# Altium PCB Calculator_PCB.PcbDoc
Units mm, origin at the board's own origin, x right, y up, seen from the top; angles counter-clockwise.
Board outline 55 x 114 mm, 2 copper layers (Top Layer, Bottom Layer); 61 components, 55 nets, 256 pads, 33 vias.
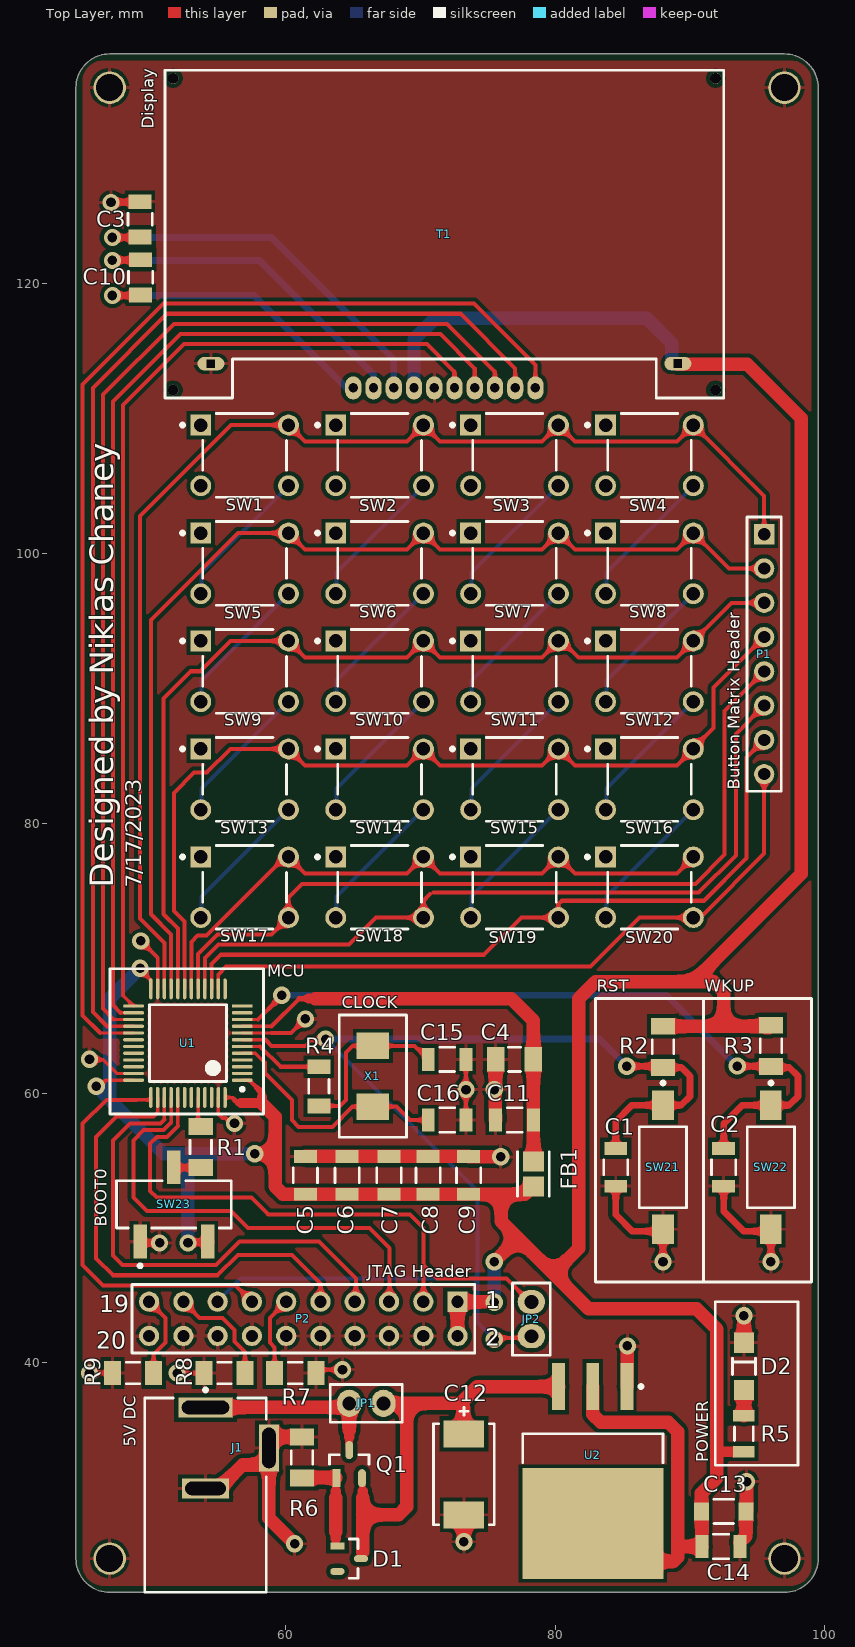
[diagram p0: Top Layer view]
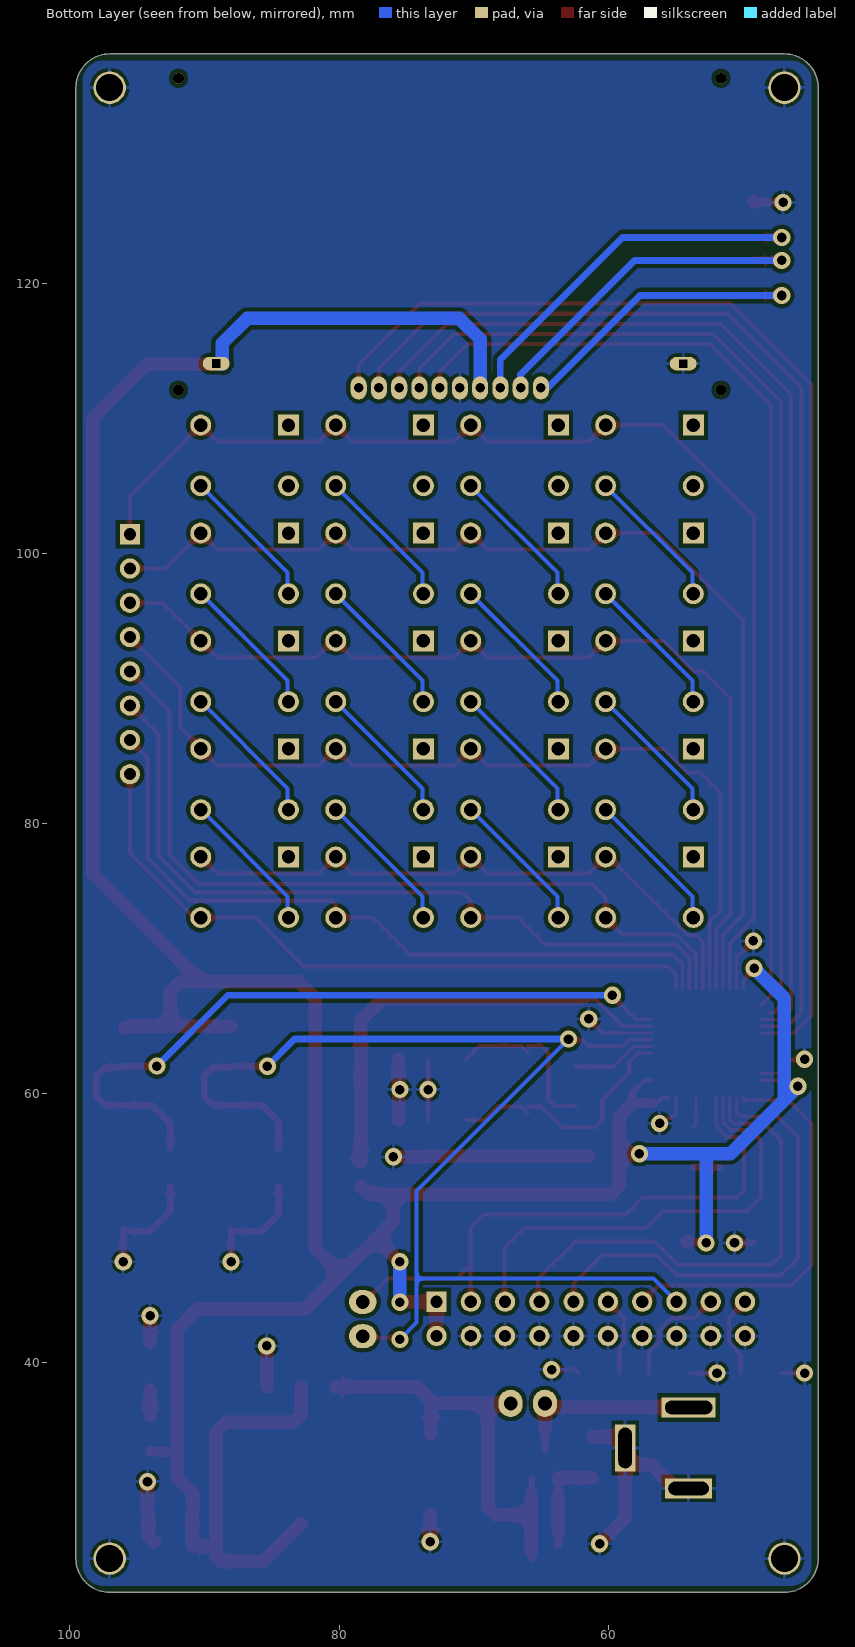
[diagram p1: Bottom Layer view, seen from below]
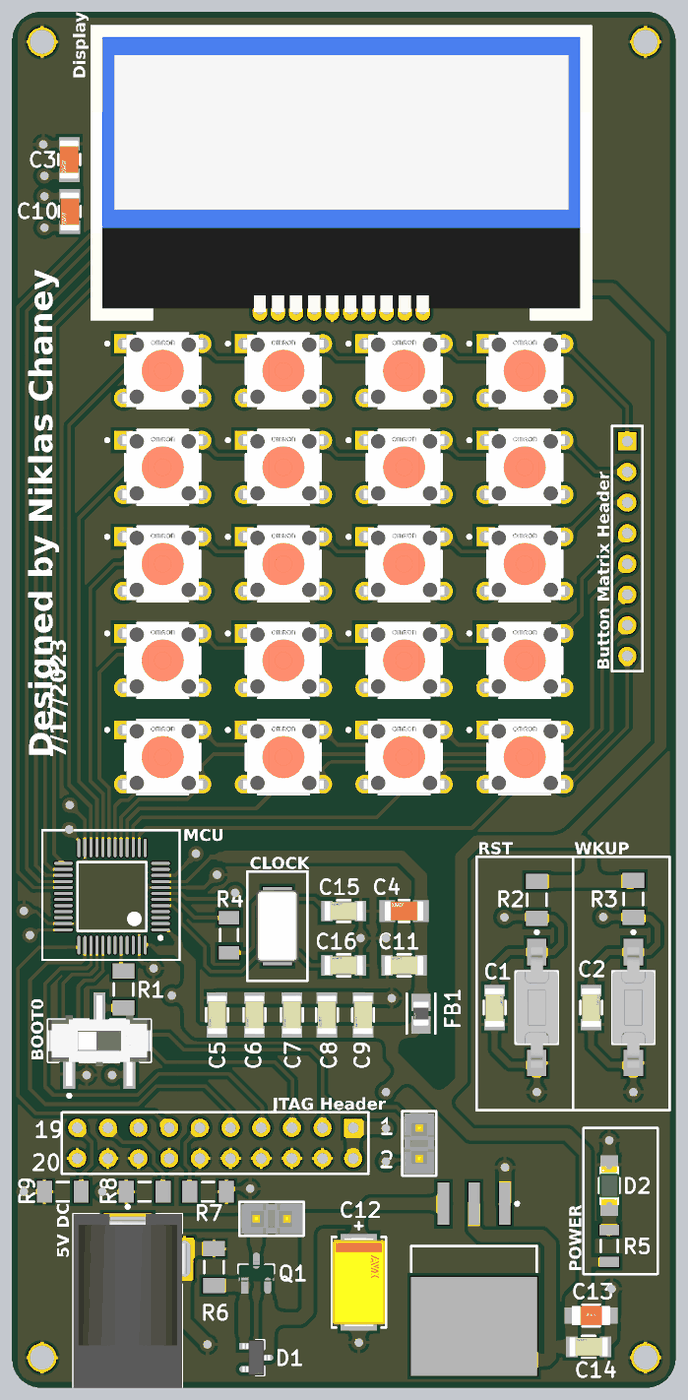
[diagram p2: 3D render of the assembled board from above, using the file's embedded part models]

## Layer stack, top to bottom
Top Solder: solder mask 0.0102, Solder Resist, Dk 3.5
Top Layer: signal copper 0.0356
Dielectric 1: dielectric 0.32, FR-4, Dk 4.8
Bottom Layer: signal copper 0.0356
Bottom Solder: solder mask 0.0102, Solder Resist, Dk 3.5

## Board outline
44.5,25.5 ccw(c47,25.5) 47,23 97,23 ccw(c97,25.5) 99.5,25.5 99.5,134.5 ccw(c97,134.5) 97,137 47,137 ccw(c47,134.5) 44.5,134.5

## Design rules (kind name [scope] priority, off if disabled: settings)
Clearance [All] p1: gap=0.127 ignorepadtopadclearanceinfootprint=TRUE
HoleSize [All] p1: absolutevalues=TRUE maxlimit=5 minlimit=0.025 maxpercent=80.000 minpercent=20.000
MinimumSolderMaskSliver [All] p1: minsoldermaskwidth=0.046
PolygonConnect [All] p1: connectstyle=Relief reliefconductorwidth=0.254 reliefentries=4 polygonreliefangle="90 Angle" airgapwidth=0.254
RoutingVias [All] p1: holewidth=0.3 width=0.6 viastyle="Through Hole" minholewidth=0.3 minwidth=0.6 maxholewidth=0.3 maxwidth=0.6
SilkToSolderMaskClearance [IsPad] p1: minsilkscreentomaskgap=0.1 clearancetoexposedcopper=TRUE
SolderMaskExpansion [All] p1: expansion=0.102 istentingtop=FALSE
Width [All] p1: maxlimit=1 minlimit=0.25 preferedwidth=0.5
27 further rules are at their usual default settings.

## Components (designator, comment, footprint, x,y, rotation, side; value= is the part's Value field where it differs from the comment)
C1 "100nF" FP-C1206C-EB-MFG 84.5,54.5 r270 top value="0.10 μF"
C2 "100nF" FP-C1206C-EB-MFG 92.5,54.5 r270 top value="0.10 μF"
C3 "1uF" FP-1206-L_3_2_0_2-W_1_6_0-IPC_C 49.25,124.75 r270 top
C4 "10uF" FP-1206-L_3_2_0_2-W_1_6_0-IPC_B 77,62.5 r180 top
C5 "100nF" FP-C1206C-EB-MFG 61.5,53.9 r90 top value="0.10 μF"
C6 "100nF" FP-C1206C-EB-MFG 64.6,53.9 r90 top value="0.10 μF"
C7 "100nF" FP-C1206C-EB-MFG 67.7,53.9 r90 top value="0.10 μF"
C8 "100nF" FP-C1206C-EB-MFG 70.6,53.9 r90 top value="0.10 μF"
C9 "100nF" FP-C1206C-EB-MFG 73.6,53.9 r90 top value="0.10 μF"
C10 "1uF" FP-1206-L_3_2_0_2-W_1_6_0-IPC_C 49.3,120.449 r270 top
C11 "10nF" FP-C1206C-EB-MFG 77,58 r0 top value="10,000 pF"
C12 "220uF" FP-TAJE-MFG 73.25,31.75 r90 top
C13 "47uF" FP-C3216-160-0_2-MFG 92.5,29 r0 top
C14 "100nF" FP-C1206C-EB-MFG 92.3,26.4 r0 top value="0.10 μF"
C15 "20pF" FP-C1206C-EB-MFG 72,62.5 r0 top value="20 pF"
C16 "20pF" FP-C1206C-EB-MFG 72,58 r0 top value="20 pF"
D1 "BZX84-C15,215" FP-SOT23-IPC_C 64.75,25.5 r0 top
D2 "HSMG-C150" FP-HSMG-C150-MFG 94,39.75 r270 top
FB1 "BLM21AG121SN1D" FP-BLM21-0_2-t0_85-e0_5-IPC_A 78.4,54 r270 top
J1 "PJ-002A" CUI-PJ-002A_V 54.1,33.7 r270 top
JP1 "Jumper" "Jumper Small - 2.54 - GRAY" 66.02,37 r0 top
JP2 "Jumper" "Jumper Small - 2.54 - GRAY" 78.25,43.25 r270 top
P1 "Header 8" HDR1X8 95.5,101.41 r270 top
P2 "JTAG" HDR2X10 72.78,44.54 r180 top
Q1 "FDN360P" FP-527AG-IPC_B 64.75,32.5 r90 top
R1 "10K" RESC3116X65X40ML10T20 53.75,56 r270 top
R2 "10K" RESC3116X65X40ML10T20 88,63.425 r90 top
R3 "10K" RESC3116X65X40ML10T20 96,63.5 r90 top
R4 "390R" RESC3216X60X45NL10T20 62.5,60.5 r270 top
R5 "330R" RESC3116X65X40LL10T20 94,34.75 r90 top
R6 "10K" RESC3116X65X40ML10T20 61.25,33 r270 top
R7 "10K" RESC3116X65X40ML10T20 60.75,39.25 r180 top
R8 "10K" RESC3116X65X40ML10T20 55.5,39.25 r0 top
R9 "10K" RESC3116X65X40ML10T20 48.725,39.25 r0 top
SW1 "B3F-1055" FP-B3F-1055-MFG 57,107.25 r0 top
SW2 "B3F-1055" FP-B3F-1055-MFG 67,107.25 r0 top
SW3 "B3F-1055" FP-B3F-1055-MFG 77,107.25 r0 top
SW4 "B3F-1055" FP-B3F-1055-MFG 87,107.25 r0 top
SW5 "B3F-1055" FP-B3F-1055-MFG 57,99.25 r0 top
SW6 "B3F-1055" FP-B3F-1055-MFG 67,99.25 r0 top
SW7 "B3F-1055" FP-B3F-1055-MFG 77,99.25 r0 top
SW8 "B3F-1055" FP-B3F-1055-MFG 87,99.25 r0 top
SW9 "B3F-1055" FP-B3F-1055-MFG 57,91.25 r0 top
SW10 "B3F-1055" FP-B3F-1055-MFG 67,91.25 r0 top
SW11 "B3F-1055" FP-B3F-1055-MFG 77,91.25 r0 top
SW12 "B3F-1055" FP-B3F-1055-MFG 87,91.25 r0 top
SW13 "B3F-1055" FP-B3F-1055-MFG 57,83.25 r0 top
SW14 "B3F-1055" FP-B3F-1055-MFG 67,83.25 r0 top
SW15 "B3F-1055" FP-B3F-1055-MFG 77,83.25 r0 top
SW16 "B3F-1055" FP-B3F-1055-MFG 87,83.25 r0 top
SW17 "B3F-1055" FP-B3F-1055-MFG 57,75.25 r0 top
SW18 "B3F-1055" FP-B3F-1055-MFG 67,75.25 r0 top
SW19 "B3F-1055" FP-B3F-1055-MFG 77,75.25 r0 top
SW20 "B3F-1055" FP-B3F-1055-MFG 87,75.25 r0 top
SW21 "FSMSM" TECO-FSMSM-2_V 88,54.5 r270 top
SW22 "FSMSM" TECO-FSMSM-2_V 96,54.5 r270 top
SW23 "JS102011SCQN" FP-JS102011SCQN-MFG 51.75,51.75 r0 top
T1 "NHD-C0216CZ-NSW-BBW-3V3" NHD-C0216CZ-NSW-BBW-3V3 71.8,123.65 r0 top
U1 "STM32F103CBT6" STM-LQFP48_L 52.8,63.7 r180 top
U2 "LD1086D2M33TR" D2PAK_A_L 82.8,32 r270 top
X1 "ECS-160-20-23A-EN-TR" ECX-64AEN/64CEN 66.5,61.25 r90 top

## Footprints (in the part's own frame and the unit in brackets; to place one, negate y for a bottom-side part, rotate by r counter-clockwise, add the part's x,y. Pads: shape width x height; smd on the part's side, far side on the other; paste and mask are expansions set on the pad)
CUI-PJ-002A_V [mm] "THD, 3-Leads, Body 14.4x9mm, Height 11mm"
  rect 1.5x4 hole 1 slot 3.5 at 90 deg: 1(-3,0)
  rect 1.5x3.5 hole 1 slot 3 at 90 deg: 2(3,0)
  rect 3.5x1.5 hole 1 slot 3 at 0 deg: 3(0,4.7)
  silkscreen extent -4.42,-4.5 10.7,4.5, body extent -3.7,-4.5 10.7,4.9, height 11
D2PAK_A_L [mm] "D2-PAK, 4-Leads, Body 9.2x10.2mm, Pitch 2.54mm, Lead Span 15.4mm, IPC High Density"
  rect 3.5x0.95 smd: 1(-6.25,2.54) 2(-6.25,0) 3(-6.25,-2.54)
  rect 8.2x10.45 smd: 4(3.9,0)
  silkscreen extent -6.37,-5.2 -0.6,5.2, body extent -2.75,-5.2 6.6,5.2, height 4.6
ECX-64AEN/64CEN [mm]
  rect 1.96x2.4 smd: 1(-2.25,0) 2(2.25,0)
  silkscreen extent -4.53,-2.5 4.53,2.5, body extent -3,-1.75 3,1.75, height 1.11
FP-527AG-IPC_B [mm]
  rect 1.336x0.585 smd paste+0 mask+0: 1(-1.04,0.95)
  rrect100% 1.336x0.585 smd paste+0 mask+0: 2(-1.04,-0.95) 3(1.04,0)
  silkscreen extent 0,-1.46 0.7,1.46, body extent -1.96,-1.71 1.96,1.71, height 0.25
FP-1206-L_3_2_0_2-W_1_6_0-IPC_B [mm]
  rect 1.305x1.806 smd paste+0 mask+0: 1(-1.401,0) 2(1.401,0)
  silkscreen extent -0.45,-0.9 0.45,0.9, body extent -2.3,-1.15 2.3,1.15, height 0.25
FP-1206-L_3_2_0_2-W_1_6_0-IPC_C [mm]
  rect 1.105x1.706 smd paste+0 mask+0: 1(-1.301,0) 2(1.301,0)
  silkscreen extent -0.45,-0.9 0.45,0.9, body extent -1.95,-1 1.95,1, height 0.25
FP-B3F-1055-MFG [mm]
  rect 1.55x1.55 hole 1 paste-1000 mask+0: 1(-3.25,2.25)
  round 1.55 hole 1 paste-1000 mask+0: 2(3.25,2.25) 3(-3.25,-2.25) 4(3.25,-2.25)
  silkscreen extent -4.72,-3.1 3.1,3.1, body extent -4.13,-3.2 4.13,3.2, height 0.25
FP-BLM21-0_2-t0_85-e0_5-IPC_A [mm]
  rect 1.455x1.556 smd paste+0 mask+0: 1(-0.926,0) 2(0.926,0)
  silkscreen extent -1.65,-1.18 1.65,1.18, body extent -2.15,-1.28 2.15,1.28, height 0.25
FP-C1206C-EB-MFG [mm]
  rect 0.95x1.7 smd paste+0 mask+0: 1(-1.4,0) 2(1.4,0)
  silkscreen extent -0.55,-0.9 0.55,0.9, body extent -2,-1 2,1, height 0.25
FP-C3216-160-0_2-MFG [mm]
  rect 1.1x1.35 smd paste+0 mask+0: 1(-1.65,0) 2(1.65,0)
  silkscreen extent -0.72,-0.9 0.72,0.9, body extent -2.3,-1 2.3,1, height 0.25
FP-HSMG-C150-MFG [mm]
  rect 1.5x1.5 smd paste+0 mask+0: 1(-1.75,0) 2(1.75,0)
  silkscreen extent -0.6,-0.85 0.6,0.85, body extent -2.6,-0.95 2.6,0.95, height 0.25
FP-JS102011SCQN-MFG [mm]
  rect 1x2.5 smd paste+0 mask+0: 1(-2.5,-2.75) 2(0,2.75) 3(2.5,-2.75)
  silkscreen extent -4.25,-4.67 4.25,1.75, body extent -4.35,-4.1 4.35,4.1, height 0.25
FP-SOT23-IPC_C [mm]
  rect 1.055x0.522 smd paste+0 mask+0: 1(-0.875,0.95)
  rrect100% 1.055x0.522 smd paste+0 mask+0: 2(-0.875,-0.95) 3(0.875,0)
  silkscreen extent 0,-1.45 0.65,1.45, body extent -1.5,-1.55 1.5,1.55, height 0.25
FP-TAJE-MFG [mm]
  rect 2x3 smd paste+0 mask+0: 1(-3,0) 2(3,0)
  silkscreen extent -3.75,-2.25 4.97,2.25, body extent -4.1,-2.35 4.1,2.35, height 0.25
HDR1X8 [mm] "Connector; Header; 8 Position"
  rect 1.5x1.5 hole 0.9: 1(0,0)
  round 1.5 hole 0.9: 2(2.54,0) 3(5.08,0) 4(7.62,0) 5(10.16,0) 6(12.7,0) 7(15.24,0) 8(17.78,0)
  silkscreen extent -1.27,-1.27 19.05,1.27
HDR2X10 [mm] "Connector; Header; 10x2 Position"
  rect 1.5x1.5 hole 0.9: 1(0,0)
  round 1.5 hole 0.9: 2(0,2.54) 3(2.54,0) 4(2.54,2.54) 5(5.08,0) 6(5.08,2.54) 7(7.62,0) 8(7.62,2.54) 9(10.16,0) 10(10.16,2.54) 11(12.7,0) 12(12.7,2.54) 13(15.24,0) 14(15.24,2.54) 15(17.78,0) 16(17.78,2.54) 17(20.32,0) 18(20.32,2.54) 19(22.86,0) 20(22.86,2.54)
  silkscreen extent -1.27,-1.27 24.13,3.81
"Jumper Small - 2.54 - GRAY" [mil]
  oval 70x80 hole 40: 1(-50,0) 2(50,0)
  silkscreen extent -105,-55 105,55, body extent -100,-50 100,50, height 337
NHD-C0216CZ-NSW-BBW-3V3 [mm]
  rrect100% 1.2x1.7 hole 0.7: 1(6.75,-11.4) 2(5.25,-11.4) 3(3.75,-11.4) 4(2.25,-11.4) 5(0.75,-11.4) 6(-0.75,-11.4) 7(-2.25,-11.4) 8(-3.75,-11.4) 9(-5.25,-11.4) 10(-6.75,-11.4)
  oval 2x1 hole 0.6 square: A(17.304,-9.59) K(-17.3,-9.6)
  round 0.8 hole 0.8 unplated: TH(-20.1,-11.55) TH(-20.1,11.55) TH(20.1,-11.55) TH(20.1,11.55)
  silkscreen extent -20.7,-12.15 20.7,12.15, body extent -20.7,-12.15 20.7,12.15, height 4.1
RESC3116X65X40LL10T20 [mm] "Chip Resistor, 2-Leads, Body 3.10x1.60mm, IPC High Density"
  rect 0.85x1.6 smd: 1(-1.325,0) 2(1.325,0)
  silkscreen extent -0.5,-0.7 0.5,0.7, body extent -1.6,-0.85 1.6,0.85, height 0.65
RESC3116X65X40ML10T20 [mm] "Chip Resistor, 2-Leads, Body 3.10x1.60mm, IPC Low Density"
  rect 1.25x1.8 smd: 1(-1.525,0) 2(1.525,0)
  silkscreen extent -0.5,-0.8 0.5,0.8, body extent -1.6,-0.85 1.6,0.85, height 0.65
RESC3216X60X45NL10T20 [mm] "Chip Resistor, 2-Leads, Body 3.20x1.60mm, IPC Medium Density"
  rect 1.1x1.7 smd: 1(-1.45,0) 2(1.45,0)
  silkscreen extent -0.5,-0.75 0.5,0.75, body extent -1.65,-0.85 1.65,0.85, height 0.6
STM-LQFP48_L [mm] "QFP, 48-Leads, Body 7x7mm, Pitch 0.5mm, IPC High Density"
  oval 1.55x0.25 smd: 1(-4.025,2.75) 2(-4.025,2.25) 3(-4.025,1.75) 4(-4.025,1.25) 5(-4.025,0.75) 6(-4.025,0.25) 7(-4.025,-0.25) 8(-4.025,-0.75) 9(-4.025,-1.25) 10(-4.025,-1.75) 11(-4.025,-2.25) 12(-4.025,-2.75) 25(4.025,-2.75) 26(4.025,-2.25) 27(4.025,-1.75) 28(4.025,-1.25) 29(4.025,-0.75) 30(4.025,-0.25) 31(4.025,0.25) 32(4.025,0.75) 33(4.025,1.25) 34(4.025,1.75) 35(4.025,2.25) 36(4.025,2.75)
  oval 0.25x1.55 smd: 13(-2.75,-4.025) 14(-2.25,-4.025) 15(-1.75,-4.025) 16(-1.25,-4.025) 17(-0.75,-4.025) 18(-0.25,-4.025) 19(0.25,-4.025) 20(0.75,-4.025) 21(1.25,-4.025) 22(1.75,-4.025) 23(2.25,-4.025) 24(2.75,-4.025) 37(2.75,4.025) 38(2.25,4.025) 39(1.75,4.025) 40(1.25,4.025) 41(0.75,4.025) 42(0.25,4.025) 43(-0.25,4.025) 44(-0.75,4.025) 45(-1.25,4.025) 46(-1.75,4.025) 47(-2.25,4.025) 48(-2.75,4.025)
  silkscreen extent -4.15,-2.85 2.85,3.55, body extent -3.5,-3.5 3.5,3.5, height 1.6
TECO-FSMSM-2_V [mm] "SMD, 2-Leads, Body 6x3.5mm, Pitch 9.19mm"
  rect 2.2x1.6 smd: 1(-4.595,0)
  rect 2.18x1.6 smd: 2(4.595,0)
  silkscreen extent -6.37,-1.75 3,1.75, body extent -4.98,-1.75 4.98,1.75, height 4.4

## Part data
C1 C2 C5 C6 C7 C8 C9 C14: library part CMP-03020-021070-1, "CAP CER 0.1UF 16V 10% X7R 1206", Capacitance="0.10 μF", Manufacturer=KEMET, Manufacturer Part Number=C1206C104K4RACTU, Package=C1206C-EB, Temperature="-55°C to +150°C", Temperature Characteristic=X7R, Temperature Coefficient=15%, Temperature Range High=+150°C, Temperature Range Low=-55°C, Tolerance=0.1, Voltage Rating="16 V", Automotive=Yes, Automotive Grade="Grade 0", Category=Cap, ComponentLink2Description=Datasheet, ComponentLink2URL=https://content.kemet.com/datasheets/KEM_C1007_X8R_ULTRA_150C_SMD.pdf, Device Class L1="Passive Components", Device Class L2=Capacitors, Device Class L3="Ceramic Capacitors", Digikey Description="CAP CER 0.1UF 16V 10% X7R 1206", Height=0.88mm, Ipc Land Pattern Name=CAPC320160X78, Lead Free=Yes, Material=Ceramic, Mouser Description="Multilayer Ceramic Capacitors MLCC - SMD/SMT 16volts 0.1uF X7R 10%", Octopart=https://octopart.com/c1206c104k4ractu-kemet-12577600, RoHS=TRUE
C3 C10: library part CMP-04427-011211-1, "General Purpose Ceramic Capacitor, 1206, 1uF, 20%, X7R, 15%, 16V", Case Code (Imperial)=1206, Case Code (Metric)=3216, Dielectric=X7R, Max Operating Temperature=125°C, Min Operating Temperature=-55°C, Package Quantity=1, Tolerance=20%, Voltage Rating=16V, Capacitance=1uF, Case/Package=1206, Construction=Flat, Contact Plating=Tin, Depth=1.6mm, Dissipation Factor=3.5%, Lead Free="Lead Free", Length=3.2mm, Mount="Surface Mount", Number of Pins=2, Packaging="Tape and Reel", Radiation Hardening=No, REACH SVHC="No SVHC", RoHS Compliant=Yes, Series=-, Termination=SMD/SMT, Thickness=0.05inch, Voltage Rating (DC)=16V, Width=1.6mm
C4: library part CMP-04427-000082-1, "General Purpose Ceramic Capacitor, 1206, 10uF, 10%, X5R, 15%, 16V", Case Code (Imperial)=1206, Case Code (Metric)=3216, Dielectric=X5R, Max Operating Temperature=85°C, Min Operating Temperature=-55°C, Package Quantity=1, Tolerance=10%, Voltage=16V, Capacitance=10uF, Case/Package=1206, Construction=Flat, Depth=1.6mm, Height=0.07mm, Lead Free="Lead Free", Length=3.2mm, Mount="Surface Mount", Number of Pins=2, Packaging="Tape and Reel", Radiation Hardening=No, REACH SVHC="No SVHC", RoHS Compliant=Yes, Series=-, Size=1.78mm, Termination=SMD/SMT, Thickness=0.07inch, Voltage Rating=16V, Voltage Rating (DC)=16V, Width=1.6mm
C11: library part CMP-1037-03529-2, "CAP CER 10000PF 200V X7R 1206", Capacitance="10,000 pF", Manufacturer=KEMET, Manufacturer Part Number=C1206C103K2RACTU, Package=C1206C-EB, Temperature="-55°C to +150°C", Temperature Characteristic=X7R, Temperature Coefficient=15%, Temperature Range High=+150°C, Temperature Range Low=-55°C, Tolerance=0.1, Voltage Rating="200 V", Automotive=Yes, Automotive Grade="Grade 0", Category=Cap, ComponentLink2Description=Datasheet, ComponentLink2URL=https://content.kemet.com/datasheets/KEM_C1007_X8R_ULTRA_150C_SMD.pdf, Device Class L1="Passive Components", Device Class L2=Capacitors, Device Class L3="Ceramic Capacitors", Digikey Description="CAP CER 10000PF 200V X7R 1206", Height=0.88mm, Ipc Land Pattern Name=CAPC320160X78, Lead Free=Yes, Material=Ceramic, Mouser Description="Multilayer Ceramic Capacitors MLCC - SMD/SMT 200volts 10000pF X7R 10%", Octopart=https://octopart.com/c1206c103k2ractu-kemet-2299149, RoHS=TRUE
C12: library part CMP-04424-000272-1, "220uF 16V  ±20% 500mΩ 2917  SMD Tantalum Capacitor", Case Code (Imperial)=2917, Case Code (Metric)=7343, ESR (Equivalent Series Resistance)=500mR, Leakage Current=35.2uA, Max Operating Temperature=125°C, Min Operating Temperature=-55°C, Package Quantity=1, Tolerance=20%, Voltage Rating=16V, Capacitance=220uF, Case/Package=2917, Construction=Flat, Depth=4.3mm, Dissipation Factor=10%, Features="General Purpose", Height=4.3mm, Height - Seated (Max)=0.169inch, Lead Free="Lead Free", Length=7.3mm, Mount="Surface Mount", Number of Pins=2, Packaging="Tape and Reel", Polarity=Polar, Radiation Hardening=No, REACH SVHC="No SVHC", RoHS Compliant=Yes, Series=TAJ, Termination=SMD/SMT, Voltage Rating (DC)=16V, Width=4.3mm
C13: library part CMP-2000-07442-2, "Multilayer Ceramic Capacitors 47uF ±20% 16V X5R SMD 1206", Case Code (Imperial)=1206, Case Code (Metric)=3216, Dielectric=X5R, Dielectric Material=Ceramic, Max Operating Temperature=85°C, Min Operating Temperature=-55°C, Package Quantity=1, Tolerance=20%, Voltage Rating=16V, Capacitance=47uF, Case/Package=1206, Construction=Flat, Depth=1.6mm, Height=1.6mm, Lead Free="Lead Free", Length=3.2mm, Mount="Surface Mount", Packaging="Tape and Reel", Radiation Hardening=No, REACH SVHC="No SVHC", Resistor Type=Ceramic, RoHS Compliant=Yes, Series=C, Termination=SMD/SMT, Thickness=0.071inch, Voltage Rating (DC)=16V, Weight=0.000571oz, Width=0.063inch
C15 C16: library part CMP-1037-00940-2, "1206 C 20pF Ceramic Multilayer Capacitor; 50 VDC; +125degC; C0G Dielec; +/-5%", Capacitance="20 pF", Manufacturer=KEMET, Manufacturer Part Number=C1206C200J5GACTU, Package=C1206C-EB, Temperature="-55°C to +150°C", Temperature Characteristic=C0G, Temperature Coefficient=15%, Temperature Range High=+150°C, Temperature Range Low=-55°C, Tolerance=0.05, Voltage Rating="50 V", Automotive=Yes, Automotive Grade="Grade 0", Category=Cap, ComponentLink2Description=Datasheet, ComponentLink2URL=https://content.kemet.com/datasheets/KEM_C1007_X8R_ULTRA_150C_SMD.pdf, Device Class L1="Passive Components", Device Class L2=Capacitors, Device Class L3="Ceramic Capacitors", Digikey Description="1206 C 20pF Ceramic Multilayer Capacitor; 50 VDC; +125degC; C0G Dielec; +/-5%", Height=0.88mm, Ipc Land Pattern Name=CAPC320160X78, Lead Free=Yes, Material=Ceramic, Mouser Description="1206 C 20pF Ceramic Multilayer Capacitor; 50 VDC; +125degC; C0G Dielec; +/-5%", Octopart=https://octopart.com/c1206c200j5gactu-kemet-139653, RoHS=TRUE
D1: library part CMP-14400-000028-1, "DIODE ZENER 15V 250MW TO236AB"
D2: library part CMP-2000-05061-2, "LED GREEN DIFFUSED 1206 SMD", Colour=Green, Forward Current=20mA, Forward Voltage=2.2V, Manufacturer=Broadcom, Max Junction Temp=+95°C, Power Dissipation=65mW, Reverse Voltage=5V, Temperature="-40°C to +85°C", Temperature Range High=+85°C, Temperature Range Low=-40°C, Automotive=No, Category=Diode, ComponentLink2Description=Datasheet, ComponentLink2URL=https://docs.broadcom.com/docs/AV02-0551EN, Device Class L1=Optoelectronics, Device Class L2=LEDs, Device Class L3=unset, Digikey Description="LED GREEN DIFFUSED 1206 SMD", Height=1.2mm, Ipc Land Pattern Name=DIOCP320160X55, Lead Free=Yes, Led Orientation="Top View", Luminous Intensity=15mcd, Manufacturer Part Number=HSMG-C150, Mouser Description="LED Uni-Color Green 570nm 2-Pin Chip LED T/R", Octopart=https://octopart.com/hsmg-c150-broadcom-71131304, Package=HSMG-C150, Peak Emmision Wavelength=570nm, RoHS=TRUE, Viewing Angle=170°, Wavelength=572nm
FB1: library part CMP-0686-00716-3, "FERRITE BEAD 120 OHM 0805 1LN", Case Code (Imperial)=0805, Case Code (Metric)=2012, Current Rating=800mA, DC Current=200mA, DC Resistance (DCR)=100mR, Frequency=100MHz, Max Current Rating=1A, Max Operating Temperature=125°C, Min Operating Temperature=-55°C, Package Quantity=1, Resistance=150mR, Tolerance=25%, Case/Package=0805, Core Material=Ferrite, DC Resistance-Max=100mR, Depth=1.25mm, Height=0.85mm, Impedance=120R, Lead Free="Lead Free", Length=2mm, Material=Steel, Max DC Current=200mA, Military Standard=Not, Number of Circuits=1, Number of Lines=1, Number of Pins=2, Packaging="Tape and Reel", Radiation Hardening=No, REACH SVHC="No SVHC", Series=BLM21A, Shielding=Unshielded, Termination=SMD/SMT, Test Frequency=100MHz, Width=1.25mm
J1: library part CMP-2000-06895-2, "Through Hole Right Angle DC Power Jack, 2.5 A, 2 mm Center Pin, 3 Position, -25 to 85 degC, RoHS, Bulk", Current Rating=2.5A, Flammability Rating=UL94V-0, Insulation Resistance=50MOhms, Manufacturer=CUIInc., Operating Temperature Range=-25Cto+85C, Package Description="3-Pin Through Hole Device, Body 14.4 x 9 mm, Height 11 mm", Voltage Rating=24V, Brand=CUI, Connector Type=DCPowerJack, Contact Gender=Male, Contact Material=Copper, Contact Plating=Nickel, Datasheet URL=http://www.cui.com/product/resource/pj-002a.pdf, Datasheet Version="Rev. 1.03, 04/2016", Factory Pack Quantity=500, Housing Material=PolybutyleneTerephthalate(PBT), Inside Contact Diameter=2mm, Manufacturer URL=http://www.cui.com/, Mounting Angle=Right, Mounting Style=ThroughHole, Mounting Technology=ThroughHole, Outside Contact Diameter=6.5mm, Package Reference=PJ-002A, Product=Jacks, Product Category=DCPowerConnectors, RoHS=True, Termination Style=ThroughHole
P1: "Header, 8-Pin", LatestRevisionDate=17-Jul-2002, LatestRevisionNote="Re-released for DXP Platform.", Publisher="Altium Limited"
P2: library part "Header 10X2", "Header, 10-Pin, Dual row", LatestRevisionDate=17-Jul-2002, LatestRevisionNote="Re-released for DXP Platform.", Publisher="Altium Limited"
Q1: library part CMP-2000-07455-3, "MOSFET P-CH 30V 2A SSOT3", Case/Package=SOT-23, Continuous Drain Current (ID)=2A, Current Rating=-2A, Drain to Source Breakdown Voltage=-30V, Drain to Source Resistance=63mR, Drain to Source Voltage (Vdss)=30V, Gate to Source Voltage (Vgs)=20V, Input Capacitance=298pF, Max Operating Temperature=150°C, Max Power Dissipation=500mW, Min Operating Temperature=-55°C, On-State Resistance=80MR, Package Quantity=1, Contact Plating=Tin, Dual Supply Voltage=-30V, Element Configuration=Single, Fall Time=6ns, Height=0.94mm, Lead Free="Lead Free", Length=2.92mm, Mount="Surface Mount", Number of Elements=1, Number of Pins=3, Packaging="Tape and Reel", Power Dissipation=500mW, Radiation Hardening=No, Rds On Max=80mR, REACH SVHC="No SVHC", Rise Time=13ns, Threshold Voltage=20V, Turn-Off Delay Time=11ns, Turn-On Delay Time=6ns, Voltage Rating (DC)=-30V, Weight=0.03g, Width=1.4mm
R1 R2 R3 R6 R7 R8 R9: library part CMP-1014-00623-2, "Chip Resistor, 10 KOhm, +/- 1%, 0.25 W, -55 to 155 degC, 1206 (3216 Metric), RoHS, Tape and Reel", Case Code (Imperial)=1206, Case Code (Metric)=3216, Manufacturer=Yageo, Max Operating Temperature=155degC, Min Operating Temperature=-55degC, Package Description="2-Pin Surface Mount Device, Body 3.1 x 1.6 mm", Package Quantity=5000, Package Reference=1206.0, Power Rating=250mW, Resistance=10KOhm, Temperature Coefficient=100ppm/degreesC, Tolerance=1%, Voltage Rating=200V, Case/Package=1206, Composition=ThickFilm, Datasheet URL=http://www.yageo.com/NewPortal/yageodocoutput?fileName=/pdf/R-Chip/PYu-RC_Group_51_RoHS_L_5.pdf, Datasheet Version="Rev. 5, 10/2016", Depth=1.6mm, Height=0.55mm, Lead Free=LeadFree, Length=3.1mm, Manufacturer URL=http://www.yageo.com/, Military Standard=Not, Packaging=TapeandReel, REACH SVHC=Unknown, RoHSCompliant=true, Termination=SMD/SMT, Width=1.6mm
R4: library part CMP-2003-02135-1, Manufacturer="Vishay Dale", Part Number=CRCW1206390RJNEA
R5: library part CMP-2000-06969-1, "Chip Resistor, 330 Ohm, +/- 1%, 250 mW, -55 to 155 degC, 1206 (3216 Metric), RoHS, Tape and Reel", Case Code - in=1206, Case Code - mm=3216, Manufacturer=Yageo, Operating Temperature Range=-55Cto+155C, Package Description="2-Pin Surface Mount Device, Body 3.1 x 1.6 mm", Power Rating=250mW(1/4W), Resistance=330Ohms, Temperature Coefficient=100PPM/C, Tolerance=1%, Voltage Rating=200V, Datasheet URL=http://www.yageo.com/documents/recent/PYu-RC_Group_51_RoHS_L_7.pdf, Datasheet Version="Rev. 7, 05/2017", Manufacturer URL=http://www.yageo.com/, Mounting Technology=SurfaceMount, Package Reference=1206, Packaging=Reel, Product=ThickFilmResistorsGeneralPurpose, Series=RC, Termination Style=SMD/SMT
SW1 SW2 SW3 SW4 SW5 SW6 SW7 SW8 SW9 SW10 SW11 SW12 SW13 SW14 SW15 SW16 SW17 SW18 SW19 SW20: library part CMP-08834-000061-1, "SWITCH TACTILE SPST-NO 0.05A 24V", Actuator Color=Orange, Contact Current Rating=50mA, Contact Resistance=100mR, Max Operating Temperature=70°C, Max Voltage Rating (DC)=24V, Min Operating Temperature=-25°C, Operating Force=2.55N, Package Quantity=1500, Supplier Part Number=SW795-ND, Actuator Length=3mm, Contact Material=Gold, Contact Plating=Silver, Contact Type="1 maker", Current Rating=50mA, Depth=6mm, Electrical Life=300000Cycles, Height=7.3mm, Illumination Type=Non-Illuminated, Lead Free="Lead Free", Length=6mm, Max Current Rating=50mA, Mechanical Life=100000Cycles, Mount="Through Hole", Number of Poles=1, Orientation=Straight, Packaging=Bag, RoHS Compliant=Yes, Series=B3F, Supplier=Digi-Key, Switch Function=Off-Mom, Switch Travel=0.25mm, Termination="PC Pins", Throw Configuration=SPST, Voltage Rating (DC)=24V, Weight=0.25g, Width=6mm
SW21 SW22: library part CMP-2000-07511-1, "FSMSM Push Button Switch, 50 mA, -35 to 85 degC, 2-Pin SMD, RoHS, Bulk", Case\/Package=SMD/SMT, Contact Current Rating=50mA, Contact Resistance=100mOhm, Manufacturer="TE Connectivity", Max Operating Temperature=85degC, Max Voltage Rating (DC)=12V, Min Operating Temperature=-35degC, Operating Force=180gf, Package Description="2-Pin Surface Mount Device, Body 6 x 3.5 mm, Pitch 9.19 mm", Package Quantity=1000, Voltage Rating (DC)=24V, Actuator Length=1.07mm, Actuator Material=Polyamide, Contact Material=Brass, Contact Plating=Silver, Current Rating=50mA, Datasheet URL=http://www.te.com/commerce/DocumentDelivery/DDEController?Action=showdoc&DocId=Customer+Drawing%7F1437566-3%7FC2%7Fpdf%7FEnglish%7FENG_CD_1437566-3_C2_1437566_3_1_c.dwg.pdf%7F1437566-3, Datasheet Version="Rev. C2, 08/2014", Electrical Life=20000Cycles, ELV=Compliant, Illumination Type=Illuminated, Lead Free=LeadFree, Manufacturer URL=http://www.te.com/, Mechanical Life=20000Cycles, Mount=SurfaceMount, Mounting Technology=SurfaceMount, Orientation=Straight, Package Reference=FSMSM, Packaging=LoosePiece, REACH SVHC=Unknown, RoHSCompliant=true, Switch Travel=0.25mm, Termination=GullWing, Throw Configuration=SPST
SW23: library part CMP-10038-000023-1, "SWITCH SLIDE SPDT 300MA 6V", Actuator Color=Black, Case/Package=SMD/SMT, Contact Resistance=70mR, Current Rating=300mA, Max Operating Temperature=85°C, Max Voltage Rating (DC)=30V, Min Operating Temperature=-40°C, Package Quantity=4000, Voltage Rating (DC)=6V, Actuator Length=2mm, Actuator Material=Nylon, Actuator Type=Standard, Contact Material="Copper Alloy", Contact Plating=Silver, Depth=7.5mm, Electrical Life=5000Cycles, Housing Material=Nylon, Length=8.5mm, Max Current Rating=300mA, Mount="Surface Mount", Orientation=Straight, Packaging="Tape and Reel", Radiation Hardening=No, RoHS Compliant=Yes, Series=JS, Switch Function=On-On, Switch Travel=2mm, Termination="Gull Wing", Throw Configuration=SPDT
T1: "LCD MOD 32DIG 16X2 TRANSMISV WHT", Supplier Part Number 1=NHD-C0216CZ-NSW-BBW-3V3-ND, Supplier 1=Digi-Key
U1: library part CMP-0237-00250-3, "ARM Cortex-M3 32-bit MCU, 128 KB Flash, 20 KB Internal RAM, 37 I/Os, 48-pin LQFP, -40 to 85 degC, Tray", I/Os (High Current)=37, Operating Frequency(F) (Processor speed) (MHz)=72, Supply Voltage(Vcc) min (V)=2, A/D Converter="2x12-bit (10 Channel)", ComponentLink1Description="Manufacturer URL", ComponentLink1URL=http://www.st.com/web/en/home.html, ComponentLink2Description=Datasheet, ComponentLink2URL=http://www.st.com/st-web-ui/static/active/en/resource/technical/document/datasheet/CD00161566.pdf, ComponentLink3Description="Package Specification", ComponentLink3URL=http://www.st.com/st-web-ui/static/active/en/resource/technical/document/datasheet/DM00058181.pdf, Core="ARM Cortex-M3", DatasheetVersion="Rev. 16", FLASH Size (Prog) (kB)=128, Internal RAM Size (kB)=20, Mounting Technology="Surface Mount", PackageDescription="48-Pin Low Profile Quad Flat Package, 7 x 7 mm Body, 0.5 mm Pitch", PackageReference=LQFP48, PackageVersion="Rev. 6, 06/2013", Packing=Tray, PartNumber=STM32F103CBT6
U2: library part CMP-0244-00505-1, "1.5A, Low Drop Positive Voltage Regulator, 3.3V, 4-Pin D2PAK/A, Tape and Reel", ComponentLink1Description="Manufacturer URL", ComponentLink1URL=http://www.st.com, ComponentLink2Description=Datasheet, ComponentLink2URL=http://www.st.com/internet/com/TECHNICAL_RESOURCES/TECHNICAL_LITERATURE/DATASHEET/CD00001884.pdf, DatasheetVersion=11/07/2011, PackageDescription="4-Pin Transistor Outline Package 2.54 mm Pitch, 15.4 mm Lead Span", PackageReference=D2PAK_A, PackageVersion=2011
X1: "CRYSTAL 16.0000MHZ 20PF SMD", Supplier Part Number 1=54AK5822, Supplier 1=Newark
JP1 JP2: Company=E.P.I.L, Defualt State=Close, Design Date=2011/11/02

## Free pads (board coordinates)
  round 2.4 hole 2: MH(47,25.5) MH(47,134.5) MH(97,25.5) MH(97,134.5)

## Via types
v1: diameter 1.27, hole 0.711, Top Layer to Bottom Layer, tented both sides, 33 vias

## Nets (pads, with @x,y where several pads share a name; then routed paths per layer and width w, separated by ;. In a path a pad name is that pad's centre, name@x,y a point inside that pad or via, vN(x,y) a via of type N, cw(c..) or ccw(c..) an arc to the next point about the centre after c; other vN are vias at no path point)
+3V3: C5.1 C6.1 C7.1 C8.1 C9.1 C13.1 C14.1 FB1.2 P2.1 P2.2 R2.2 R3.2 R5.1 SW23.3 T1.7 T1.A U1.1 U1.24 U1.36 U1.48 U2.2 U2.4 | length 274
  Top Layer w0.25: v1(46,60.5) 46.276,60.5 46.726,60.95 U1.36 ; v1(49.25,69.25) 49.25,69.175 50.05,68.375 U1.24 ; U1.48 56.075,59.675 56.25,59.5 ; U1.1 57.35,60.95 57.9,60.4
  Top Layer w0.4: 56.25,59.5 56.5,59.25 56.75,59.25 ; 57.9,60.4 58.1,60.2
  Top Layer w0.5: v1@52.85,48.95 SW23.3@54.25,48.95 ; 58.1,60.2 58.3,60 58.3,59.7 ; R2.2 R2.2@88.112,64.838 ; R3.2@95.887,65.137 R3.2
  Top Layer w0.75: 56.75,59.25 58.25,59.25 58.3,59.2 58.3,59.7 ; 92.075,33.425 R5.1
  Top Layer w1: v1(52.8,48.9) v1@52.85,48.95 ; SW23.3@54.25,48.95 SW23.3 ; v1(57.75,55.5) 59.25,55.5 ; 58.3,59.2 59.25,58.25 59.25,55.5 ; P2.2 P2.1 72.8,44.52 75.48,44.52 v1(75.5,44.5) ; v1(75.5,47.5) 77.25,49.25 ; FB1.2 78.349,53.074 77.775,52.5 76,52.5 ; U2.4 85.6,25.3 88.8,25.3 89.1,25.6 89.1,26.4 89.1,34.9 88.4,35.6 83.386,35.6 82.8,36.186 U2.2 ; R2.2 92.5,64.95 ; T1.A@89.104,114 94.25,114 98.25,110 98.25,107.5 98.25,76.25 90.25,68.25 ; 89.2,26.4 C14.1 90.875,26.425 90.875,28.975 C13.1 90.85,30.35 92,31.5 92,33.5 ; 92.075,33.425 92,33.5 ; R3.2@95.887,64.838 95.612,64.838 95.5,64.95 92.5,64.95 ; 59.25,55.5 59.25,53.086 59.836,52.5 C5.1 C6.1 C7.1 C8.1 C9.1 76,52.5 ; 76,52.5 76,50.5 77.25,49.25 ; 77.25,49.25 79.875,46.625 ; 79.875,46.625 82.5,44 90.5,44 92,42.5 92,33.5 ; 79.875,46.625 81.75,48.5 81.75,67 83,68.25 90.25,68.25 ; 90.25,68.25 91.75,68.25 92.5,67.5 92.5,64.95
  Bottom Layer w1: v1(46,60.5) 47,59.5 ; v1(49.25,69.25) 47,67 47,59.5 ; v1(52.8,48.9) 52.8,55.45 52.75,55.5 ; v1(57.75,55.5) 52.75,55.5 ; T1.7 69.55,115.85 71.1,117.4 86.814,117.4 88.654,115.56 T1.A@88.654,114 ; v1(75.5,44.5) v1(75.5,47.5) ; 47,59.5 51,55.5 52.75,55.5
BOOT0_SW: R1.2 SW23.2 | length 2
  Top Layer w0.3: SW23.2 SW23.2@51.775,54.475
  Top Layer w0.5: SW23.2@51.775,54.475 R1.2
CL+: C10.1 T1.9 | length 26
  Top Layer w0.5: v1(47.2,121.7) 47.225,121.725 49.275,121.725 C10.1
  Bottom Layer w0.5: v1(47.2,121.7) 58.1,121.7 66.55,113.25 T1.9
CL-: C10.2 T1.10 | length 22.8
  Top Layer w0.3: C10.2@49.252,119.1 C10.2
  Top Layer w0.5: v1(47.2,119.1) C10.2@49.252,119.1
  Bottom Layer w0.5: v1(47.2,119.1) 57.7,119.1 64.55,112.25 T1.10
GND: C1.2 C2.2 C3.1 C4.2 C5.2 C6.2 C7.2 C8.2 C9.2 C11.1 C12.1 C13.2 C14.2 C15.2 C16.2 D2.1 J1.2 J1.3 P2.4 P2.6 P2.8 P2.10 P2.12 P2.14 P2.16 P2.18 P2.20 pad.MH R6.1 R7.1 R8.1 R9.1 SW21.2 SW22.2 SW23.1 T1.6 T1.K U1.8 U1.23 U1.35 U1.47 U2.1 | length 94.3
  Top Layer w0.25: v1(45.5,62.5) 45.531,62.469 46.51,62.469 47.529,61.45 U1.35 ; U1.23 50.55,70.027 ; 55.05,58.45 U1.47 ; U1.8 59,64.45
  Top Layer w0.3: v1(45.5,39.25) R9.1 ; SW23.1 SW23.1@49.35,48.9 ; v1(49.301,71.276) 50.55,70.027 ; v1(52,39.25) R8.1 ; 55.05,58.45 55.352,58.148 55.59,58.148 55.988,57.75 v1(56.25,57.75) ; 59,64.45 60.45,64.45 v1(61.5,65.5) ; R7.1 62.525,39.5 v1(64.25,39.5) ; C16.2 C15.2
  Top Layer w0.5: v1@47.125,126.025 C3.1@49.225,126.025 ; SW23.1@49.35,48.9 v1(50.7,48.9) ; C1.2 84.5,51 85.75,49.75 87.845,49.75 SW21.2 v1(88,47.5) ; C2.2 92.5,51.25 94,49.75 95.845,49.75 SW22.2 v1(96,47.5) ; v1(94.2,31.2) v1@94.2,31.4
  Top Layer w1: v1(47.1,126) v1@47.125,126.025 ; C3.1@49.225,126.025 C3.1 ; J1.2 55.1,30.7 56.85,32.45 58.55,32.45 J1.3@58.8,32.7 ; v1(60.7,26.6) 58.8,28.5 J1.3@58.8,32.7 ; R6.1@61.2,34.525 59.05,34.525 58.8,34.275 J1.3 J1.3@58.8,32.7 ; C5.2 C6.2 C7.2 C8.2 C9.2 73.625,55.275 v1(75.975,55.275) v1@76,55.25 ; v1(73.25,26.75) C12.1 ; C4.2 75.599,60.422 75.5,60.323 v1(75.5,60.25) 75.5,60.177 75.575,60.102 75.575,58.025 C11.1 C11.1@75.6,58.325 ; U2.1 85.365,38.275 v1(85.365,41.265) ; C14.2@93.7,26.725 94.15,27.175 C13.2 ; D2.1 v1(94,43.5) ; C13.2@94.2,29.05 v1(94.2,31.2)
  other v1: 73.4,60.25
MCU-NRST: C1.1 JP2.2 P2.15 R2.1 SW21.1 U1.7 | length 94.7
  Top Layer w0.25: U1.7 58.55,63.95
  Top Layer w0.3: 58.55,63.95 59,63.5 61.5,63.5 61.915,63.915 62.915,63.915 v1(63,64) ; v1(75.5,41.75) 75.615,41.865 78.135,41.865 JP2.2
  Top Layer w0.5: C1.1 84.5,57.9 85.7,59.1 87.995,59.1 SW21.1 89.345,59.095 90,59.75 90,61.25 89.357,61.893 88.007,61.893 87.915,61.985 v1(85.315,61.985)
  Bottom Layer w0.3: P2.15 56.71,46.25 74.25,46.25 ; v1(63,64) 74.25,52.75 74.25,46.25 ; v1(75.5,41.75) 74.25,43 74.25,46.25
  Bottom Layer w0.5: v1(63,64) 83.3,64 v1(85.315,61.985)
MCU-OSC_IN: C16.1 U1.5 X1.1 | length 18.6
  Top Layer w0.25: U1.5 57.8,62.95 58.5,62.25
  Top Layer w0.3: 58.5,62.25 58.5,61.5 60.5,59.5 60.5,58 61,57.5 63.5,57.5 65,59 X1.1@66,59 ; X1.1@66.026,58.526 X1.1 68.25,59 69.25,58 C16.1
MCU-OSC_OUT': R4.1 U1.6 | length 6.3
  Top Layer w0.25: U1.6 58.15,63.45
  Top Layer w0.3: 58.15,63.45 59.65,61.95 R4.1
MCU-PA4_C4: P1.5 SW17.4 U1.17 | length 60.3
  Top Layer w0.25: U1.17 53.55,69.25
  Top Layer w0.3: 53.55,69.25 53.55,70.3 55,71.75 59,71.75 SW17.4 60.25,74.5 61.25,75.5 90.4,75.5 92.575,77.675 92.575,88.325 94,89.75 P1.5
MCU-PA5_C3: P1.6 SW18.4 U1.16 | length 57.2
  Top Layer w0.25: U1.16 54.05,69.25
  Top Layer w0.3: 54.05,69.25 54.05,70 55.05,71 64.75,71 66.75,73 SW18.4 70.25,74.25 70.75,74.75 ; 71.002,74.85 90.65,74.85 93.4,77.6 93.4,86.61 P1.6
MCU-PA6_C2: P1.7 SW19.4 U1.15 | length 54.6
  Top Layer w0.25: U1.15 54.55,69.25
  Top Layer w0.3: 54.55,69.25 54.55,69.55 55.25,70.25 74.75,70.25 77.5,73 SW19.4 80.25,74 80.5,74.25 91.05,74.25 94.2,77.4 94.2,84.87 P1.7
MCU-PA7_C1: P1.8 SW20.4 U1.14 | length 51.1
  Top Layer w0.25: U1.14 55.05,68.8
  Top Layer w0.3: 55.05,68.8 55.625,69.375 82.625,69.375 86.25,73 SW20.4 90.489,73.239 90.989,73.239 95.5,77.75 P1.8
MCU-PA8_R1: P1.1 SW1.2 SW2.2 SW3.2 SW4.2 U1.22 | length 92.9
  Top Layer w0.25: U1.22 51.05,69.25
  Top Layer w0.3: 51.05,69.25 51.05,71.134 49.25,72.934 49.25,102.75 56,109.5 SW1.2 61.475,108.275 69.025,108.275 SW2.2 71.475,108.275 79.025,108.275 SW3.2 81.475,108.275 89.025,108.275 SW4.2 95.5,104.25 P1.1
MCU-PA9_R2: P1.2 SW5.2 SW6.2 SW7.2 SW8.2 U1.21 | length 80.2
  Top Layer w0.25: U1.21 51.55,69.25
  Top Layer w0.3: 51.55,69.25 51.55,71.763 50.063,73.25 50.063,95.045 56.518,101.5 SW5.2 61.475,100.275 69.025,100.275 SW6.2 71.475,100.275 79.025,100.275 SW7.2 81.475,100.275 89.025,100.275 SW8.2 92.88,98.87 P1.2
MCU-PA10_R3: P1.3 SW9.2 SW10.2 SW11.2 SW12.2 U1.20 | length 72.4
  Top Layer w0.25: U1.20 52.05,69.25
  Top Layer w0.3: 52.05,69.25 52.05,72.2 51,73.25 51,89.25 53.005,91.255 53.692,91.255 55.936,93.5 SW9.2 61.475,92.275 69.025,92.275 SW10.2 71.475,92.275 79.025,92.275 SW11.2 80.5,93.5 81.725,92.275 89.025,92.275 SW12.2 93.08,96.33 P1.3
MCU-PA11_R4: P1.4 SW13.2 SW14.2 SW15.2 SW16.2 U1.19 | length 68.2
  Top Layer w0.25: U1.19 52.55,69.25
  Top Layer w0.3: 52.55,69.25 52.55,72.7 51.75,73.5 51.75,82.25 53.255,83.755 54.192,83.755 55.936,85.5 SW13.2 61.475,84.275 69.025,84.275 SW14.2 71.475,84.275 79.025,84.275 SW15.2 81.475,84.275 89.025,84.275 SW16.2 90.25,85.566 91.75,87.066 91.75,90.04 P1.4
MCU-PA12_R5: SW17.2 SW18.2 SW19.2 SW20.2 U1.18 | length 46.3
  Top Layer w0.25: U1.18 53.05,69.25
  Top Layer w0.3: 53.05,69.25 53.05,71.2 53.525,71.675 54.157,71.675 59.982,77.5 SW17.2 61.475,76.275 69.025,76.275 SW18.2 71.475,76.275 79.025,76.275 SW19.2 81.475,76.275 89.025,76.275 SW20.2
MCU-PB0_RST: T1.1 U1.29 | length 90.7
  Top Layer w0.25: 46.3,64.45 U1.29
  Top Layer w0.3: 46.3,64.45 45,65.75 45,112.5 51,118.5 74,118.5 78.55,113.95 T1.1
MCU-PB1_RS: T1.2 U1.28 | length 86.4
  Top Layer w0.25: 46.8,64.95 U1.28
  Top Layer w0.3: 46.8,64.95 45.75,66 45.75,112.25 51.25,117.75 73,117.75 77.05,113.7 T1.2
MCU-PB2_CSB: T1.3 U1.27 | length 82
  Top Layer w0.25: 47.3,65.45 U1.27
  Top Layer w0.3: 47.3,65.45 46.5,66.25 46.5,111.75 51.75,117 72,117 75.55,113.45 T1.3
MCU-PB3_SCL: T1.4 U1.26 | length 77.2
  Top Layer w0.25: 47.812,65.95 U1.26@48.15,65.95
  Top Layer w0.3: 47.812,65.95 47.25,66.512 47.25,111.25 52.25,116.25 71.5,116.25 74.05,113.7 T1.4
MCU-PB4_SI: T1.5 U1.25 | length 73.3
  Top Layer w0.25: 48,67.225 U1.25
  Top Layer w0.3: 48,67.225 48,111 52.5,115.5 70.5,115.5 72.55,113.45 T1.5
MCU-VDDA: C4.1 C11.2 FB1.1 U1.9 | length 33.9
  Top Layer w0.25: U1.9 59,64.95
  Top Layer w0.3: 59,64.95 61.025,66.975
  Top Layer w0.4: 61.025,66.975 61.475,66.975 61.5,67
  Top Layer w0.5: 61.5,67 61.75,67
  Top Layer w0.75: 61.75,67 62.25,67
  Top Layer w1: 62.25,67 76.75,67 78.401,65.349 C4.1 ; C11.2 FB1.1 78.451,54.926 FB1.1@78.7,55.175 ; C11.2 C4.1
MCU-WKUP: C2.1 R3.1 SW22.1 U1.10 | length 54.1
  Top Layer w0.25: U1.10 58,65.45
  Top Layer w0.3: 58,65.45 59.25,66.7
  Top Layer w0.5: 59.25,66.7 59.75,67.2 v1(59.75,67.25) ; C2.1 92.5,57.7 93.9,59.1 95.995,59.1 SW22.1 97.345,59.095 98,59.75 98,61.25 97.357,61.893 96.082,61.893 95.987,61.988 93.513,61.988 v1(93.5,62)
  Bottom Layer w0.5: v1(59.75,67.25) 88.25,67.25 v1(93.5,62)
MCU_BOOT0: R1.1 U1.44 | length 2.2
  Top Layer w0.25: R1.1@53.55,57.725 U1.44
  Top Layer w0.3: R1.1@53.55,57.725 R1.1
NetD1_1: D1.1 Q1.1 R6.2 | length 7.7
  Top Layer w0.5: 63.75,27 63.75,26.461 63.761,26.45 D1.1 ; 63.75,30.5 63.757,30.507 Q1.1@63.757,31.5
  Top Layer w0.75: 63.75,27 63.75,27.5 ; 63.75,30 63.75,30.5
  Top Layer w1: R6.2 61.275,31.5 Q1.1@63.757,31.5 ; 63.75,27.5 63.75,30
NetD2_2: D2.2 R5.2 | length 1.9
  Top Layer w1: R5.2 D2.2
NetJ1_1: J1.1 JP1.1 Q1.3 | length 14.2
  Top Layer w0.5: Q1.3 64.75,34.5
  Top Layer w0.75: 64.75,34.5 64.75,35
  Top Layer w1: J1.1 64.366,36.7 64.666,37 JP1.1 64.75,35
NetP2_11: P2.11 R7.2 | length 5.9
  Top Layer w0.3: R7.2 59.225,41.158 58.88,41.503 58.88,43.34 P2.11
NetP2_17: P2.17 R8.2 | length 8.2
  Top Layer w0.3: P2.17 53.66,43.34 55.357,43.34 56.261,42.436 56.261,41.582 57.025,40.818 R8.2
NetP2_19: P2.19 R9.2 | length 6.1
  Top Layer w0.3: P2.19 51.12,43.34 51.12,41.503 50.25,40.633 R9.2
NetSW1_4: SW1.4 SW5.3 | length 10.7
  Bottom Layer w0.3: SW5.3 53.813,97.063 53.813,98.563 SW1.4
NetSW2_4: SW2.4 SW6.3 | length 10.7
  Bottom Layer w0.3: SW6.3 63.813,97.063 63.813,98.563 SW2.4
NetSW3_4: SW3.4 SW7.3 | length 10.7
  Bottom Layer w0.3: SW7.3 73.813,97.063 73.813,98.563 SW3.4
NetSW4_4: SW4.4 SW8.3 | length 10.7
  Bottom Layer w0.3: SW8.3 83.813,97.063 83.813,98.563 SW4.4
NetSW5_4: SW5.4 SW9.3 | length 10.7
  Bottom Layer w0.3: SW9.3 53.813,89.063 53.813,90.563 SW5.4
NetSW6_4: SW6.4 SW10.3 | length 10.7
  Bottom Layer w0.3: SW10.3 63.813,89.063 63.813,90.563 SW6.4
NetSW7_4: SW7.4 SW11.3 | length 10.7
  Bottom Layer w0.3: SW11.3 73.813,89.063 73.813,90.563 SW7.4
NetSW8_4: SW8.4 SW12.3 | length 10.7
  Bottom Layer w0.3: SW12.3 83.813,89.063 83.813,90.563 SW8.4
NetSW9_4: SW9.4 SW13.3 | length 10.7
  Bottom Layer w0.3: SW13.3 53.813,81.063 53.813,82.563 SW9.4
NetSW10_4: SW10.4 SW14.3 | length 10.7
  Bottom Layer w0.3: SW14.3 63.813,81.063 63.813,82.563 SW10.4
NetSW11_4: SW11.4 SW15.3 | length 10.7
  Bottom Layer w0.3: SW15.3 73.813,81.063 73.813,82.563 SW11.4
NetSW12_4: SW12.4 SW16.3 | length 10.7
  Bottom Layer w0.3: SW16.3 83.813,81.063 83.813,82.563 SW12.4
NetSW13_4: SW13.4 SW17.3 | length 10.7
  Bottom Layer w0.3: SW17.3 53.813,73.063 53.813,74.563 SW13.4
NetSW14_4: SW14.4 SW18.3 | length 10.7
  Bottom Layer w0.3: SW18.3 63.813,73.063 63.813,74.563 SW14.4
NetSW15_4: SW15.4 SW19.3 | length 10.7
  Bottom Layer w0.3: SW19.3 73.813,73.063 73.813,74.563 SW15.4
NetSW16_4: SW16.4 SW20.3 | length 10.7
  Bottom Layer w0.3: SW20.3 83.813,73.063 83.813,74.563 SW16.4
TCK/SWCLK: P2.9 U1.38 | length 35.4
  Top Layer w0.25: 50.55,58.55 U1.38
  Top Layer w0.3: 46,47.75 46,56.75 47.5,58.25 50.25,58.25 50.55,58.55 ; 46.033,47.717 47.25,46.5 55,46.5 56.5,48 60.5,48 62.62,45.88 P2.9
TDI: P2.5 U1.40 | length 34
  Top Layer w0.25: 51.55,57.8 U1.40
  Top Layer w0.3: 51.55,57.8 51,57.25 49.5,57.25 48.75,56.5 48.75,52.25 49.75,51.25 56,51.25 57.25,50 66.25,50 67.75,48.5 67.75,44.59 P2.5
TDO/SWO: P2.13 U1.37 | length 30.1
  Top Layer w0.25: 49,59.5 50.05,59.5 U1.37
  Top Layer w0.3: 49,59.5 46.75,59.5 45,57.75 45,47.25 46.5,45.75 56.33,45.75 P2.13
TMS/SWDIO: P2.7 U1.39 | length 36.5
  Top Layer w0.25: 51.05,58.05 U1.39
  Top Layer w0.3: 51.05,58.05 50.75,57.75 48.5,57.75 47.25,56.5 47.25,47.95 47.95,47.25 54.886,47.25 56.636,49 62.5,49 65.25,46.25 P2.7@65.25,44.7 ; P2.7@65,44.7 P2.7
TRST: JP2.1 P2.3 U1.41 | length 44.2
  Top Layer w0.25: 52.05,57.55 U1.41
  Top Layer w0.3: 52.05,57.55 51.25,56.75 50.5,56.75 50,56.25 50,52.75 50.5,52.25 57.5,52.25 58.75,51 69.25,51 70.25,50 70.25,47.25 ; P2.3 70.25,44.55 70.25,47.25 ; JP2.1 78.123,44.52 76.393,46.25 71.25,46.25 70.25,47.25
V_in: C12.2 D1.3 JP1.2 Q1.2 U2.3 | length 33.1
  Top Layer w0.5: D1.3 65.74,25.5 65.75,25.51 65.75,26 ; Q1.2 65.716,31.444 65.716,30.534 65.75,30.5
  Top Layer w0.75: 65.75,30 65.75,30.5
  Top Layer w1: 65.75,26 65.75,28.75 ; 65.75,30 65.75,28.75 ; JP1.2 69,37 ; C12.2@73.2,34.75 73.2,36.8 73,37 ; U2.3 74.25,38.25 73,37 ; 65.75,28.75 68.414,28.75 69,29.336 69,37 ; 69,37 73,37
VOUT: C3.2 T1.8 | length 28.8
  Top Layer w0.3: C3.2@49.201,123.4 C3.2
  Top Layer w0.5: v1(47.2,123.4) C3.2@49.201,123.4
  Bottom Layer w0.5: v1(47.2,123.4) 59,123.4 68.05,114.35 T1.8
X_OSC_OUT: C15.1 R4.2 X1.2 | length 12.6
  Top Layer w0.3: R4.2 64.05,59.05 64.5,59.5 64.5,63 65,63.5 X1.2@66,63.5 ; X1.2@66.026,63.026 X1.2 69.6,63.5 C15.1
pads on no net: D1.2 SW1.1 SW1.3 SW2.1 SW2.3 SW3.1 SW3.3 SW4.1 SW4.3 SW5.1 SW6.1 SW7.1 SW8.1 SW9.1 SW10.1 SW11.1 SW12.1 SW13.1 SW14.1 SW15.1 SW16.1 SW17.1 SW18.1 SW19.1 SW20.1 T1.TH U1.2 U1.3 U1.4 U1.11 U1.12 U1.13 U1.30 U1.31 U1.32 U1.33 U1.34 U1.42 U1.43 U1.45 U1.46

## Polygon pours and split planes (outlines as drawn)
GND on Bottom Layer "GND_L02_P001" (solid, remove dead copper, pour order 1): 45,25 ccw(c46.5,25) 46.5,23.5 97.5,23.5 ccw(c97.5,25) 99,25 99,135 ccw(c97.5,135) 97.5,136.5 46.5,136.5 ccw(c46.5,135) 45,135
GND on Top Layer "GND_L01_P002" (solid, remove dead copper, pour order 2): 45,25 ccw(c46.5,25) 46.5,23.5 97.5,23.5 ccw(c97.5,25) 99,25 99,135 ccw(c97.5,135) 97.5,136.5 46.5,136.5 ccw(c46.5,135) 45,135

## Silkscreen, mask and mechanical layers (free items; w line width, h text height)
Top Overlay:
  lines w0.2: 91,46 99,46 99,67 91,67 ; 91,46 83,46 83,67 91,67 ; 91,46 91,67 ; 47.025,58.45 58.4,58.45 58.4,69.2 47.025,69.2 47.025,58.45 ; 91.875,32.425 98,32.425 98,44.525 91.875,44.525 91.875,32.425
  text "Display" at 50.573,131.45 h1.52 r90
  text "Button Matrix Header" at 93.987,82.475 h1.52 r90
  text "Designed by Niklas Chaney" at 47.853,75.2 h3 r90
  text "7/17/2023" at 49.731,75.2 h2 r90
  text "MCU" at 58.675,68.313 h1.52
  text "RST" at 83.1,67.213 h1.52
  text "WKUP" at 91.1,67.213 h1.52
  text "CLOCK" at 64.2,65.993 h1.52
  text "BOOT0" at 47.087,50.1 h1.52 r90
  text "JTAG Header" at 66.08,46.038 h1.52
  text "5V DC" at 49.212,33.772 h1.52 r90
  text "POWER" at 91.662,32.625 h1.52 r90
Mechanical 1:
  the board outline again, w0.2

## Text inside footprints (layer, text, board x,y; h text height)
P2: Top Overlay "19" at 46.225,43.775 h1.27; Top Overlay "2" at 74.83,41.29 h1.27; Top Overlay "1" at 74.83,44.04 h1.27; Top Overlay "20" at 46,41.05 h1.27